# EAGLE board BMP085 Breakout-v11 (EAGLE 5.06)
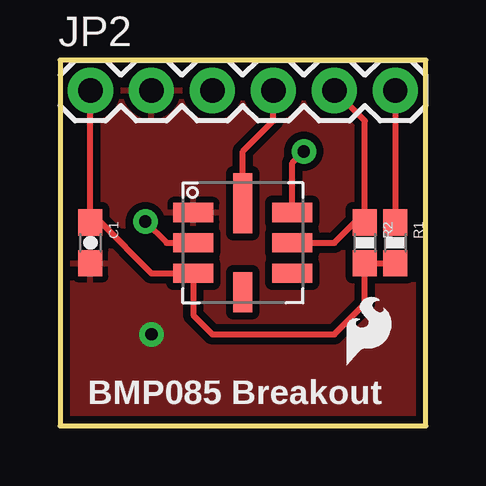
[diagram p0: board, top side]
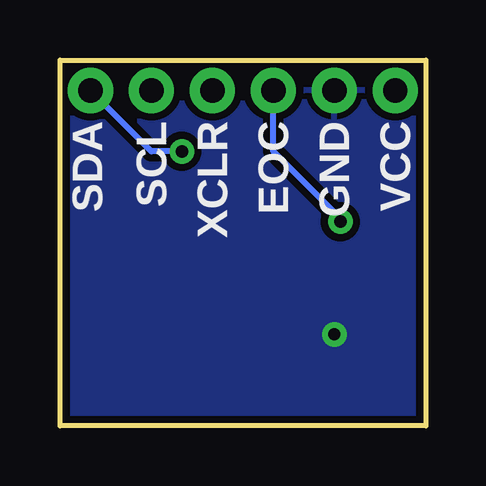
[diagram p1: board, bottom side, seen from below]

Size 15.24 x 15.24 mm. Coordinates in mm from the lower left corner, seen from the top.
Outline: 0,0 15.24,0 15.24,15.24 0,15.24 0,0
Copper layers (1*16): Top 0.035mm / dielectric 1.5mm / Bottom 0.035mm
Design rules "SparkFun": minimum track width 8mil, minimum drill 20mil, track to track 8mil, track to pad 8mil, pad to pad 8mil, via to via 8mil, smd to smd 8mil, copper to edge 9mil, drill to drill 8mil, minimum pad ring 12mil, minimum via ring 10mil, stop-mask expansion 4mil, vias tented up to drill 20mil, thermal gap 10mil

## Footprints (pad centres in the part's own frame; a part is rotated, then mirrored left to right if it is on the bottom)
0603-CAP = smd 1.1 x 1: 1 -0.85,0; 2 0.85,0
1X06 = drill 1.016 pad 1.88 round: 1 0,0; 2 2.54,0; 3 5.08,0; 4 7.62,0; 5 10.16,0; 6 12.7,0
0603-RES = smd 1.1 x 1: 1 -0.85,0; 2 0.85,0
BMP085 = smd 1.67 x 0.8: 1 -2.065,1.27; 2 -2.065,0; 3 -2.065,-1.27; 5 2.065,-1.27; 6 2.065,0; 7 2.065,1.27 | smd 0.8 x 1.67: 4 0,-2.065 | smd 0.8 x 2.5: 8 0,1.65

## Placement (x,y rotation side)
C1  100nF  [0603-CAP]  1.27,7.62 270 top
JP2  [1X06]  1.27,13.97 0 top
JP3  LOGO-SFESK  [SFE-LOGO-FLAME]  11.94,2.54 0 top
R1  4.7k  [0603-RES]  13.97,7.62 270 top
R2  4.7k  [0603-RES]  12.7,7.62 270 top
U$1  BMP085  [BMP085]  7.62,7.62 0 top

## Library data of the parts
C1 JP2 JP3 R1 R2 U$1 = SparkFun

## Nets
EOC: JP2.3 U$1.2
GND: C1.2 JP2.2 U$1.1
N$2: U$1.4
SCL: JP2.5 R2.1 U$1.6
SDA: JP2.6 R1.1 U$1.7
VCC: C1.1 JP2.1 R1.2 R2.2 U$1.3
XCLR: JP2.4 U$1.8

## Tracks (layer width: path | path; a pad name or v marks a point on that pad's centre or on a via)
EOC  (via drill 0.51)
  Top 0.254: U$1.2 4.45,7.62 v3.56,8.51
  Bottom 0.254: v3.56,8.51 3.56,8.64 6.35,11.43 JP2.3
GND  (via drill 0.51)
  other vias: 3.81,3.81
  pour Top (isolate 0.305): 0,15.24 0,0 15.24,0 15.24,15.24
  pour Bottom (isolate 0.305): 0,15.24 0,0 15.24,0 15.24,15.24
SCL
  Top 0.254: U$1.6 11.43,7.62 12.28,8.47 R2.1 12.7,12.7 JP2.5
SDA  (via drill 0.51)
  Top 0.254: JP2.6 R1.1 | U$1.7 9.69,10.96 v10.16,11.43
  Bottom 0.254: v10.16,11.43 11.43,11.43 JP2.6
VCC
  Top 0.254: R1.2 R2.2 12.7,5.08 11.43,3.81 6.35,3.81 5.55,4.61 U$1.3 3.81,6.35 1.69,8.47 C1.1 JP2.1
XCLR
  Top 0.254: U$1.8 7.62,11.43 8.89,12.7 JP2.4

## Text on the board
tPlace: BMP085 Breakout
bPlace: VCC | GND | EOC | XCLR | SCL | SDA